# EAGLE board analyzer1704 (EAGLE 6.5.0)
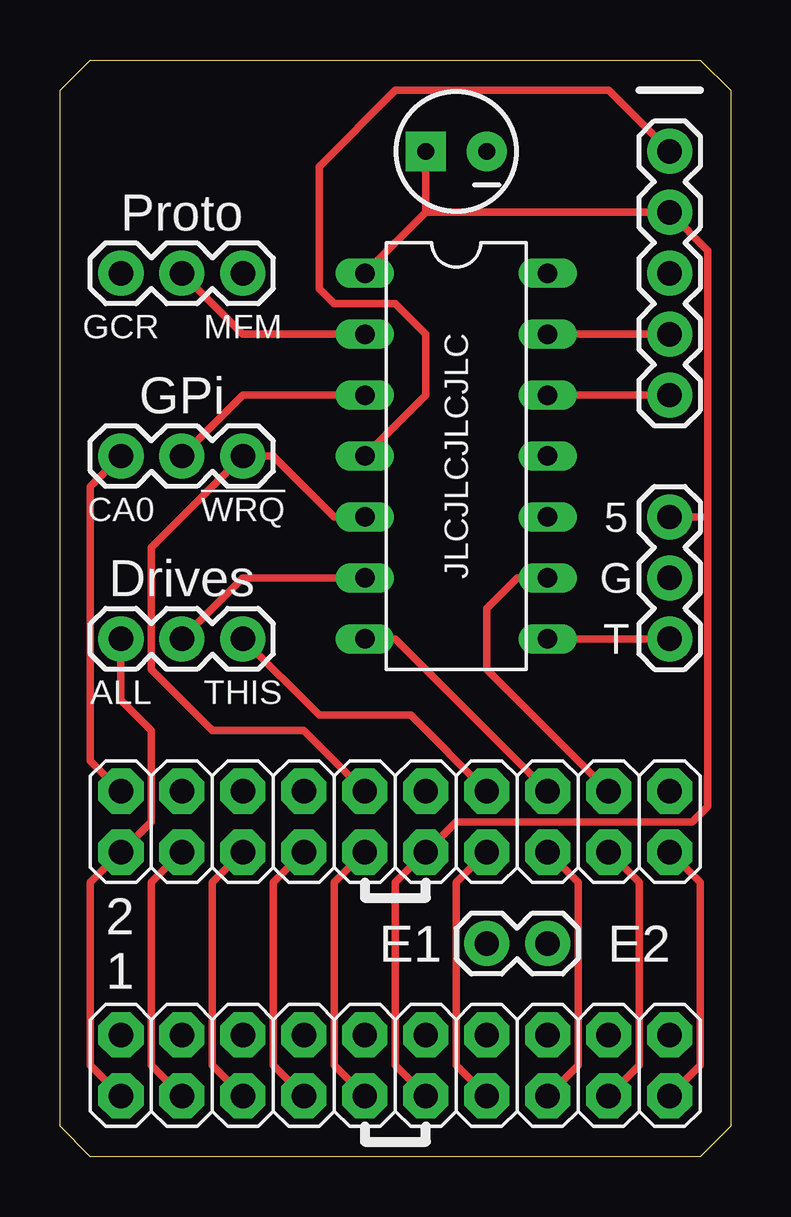
[diagram p0: board, top side]
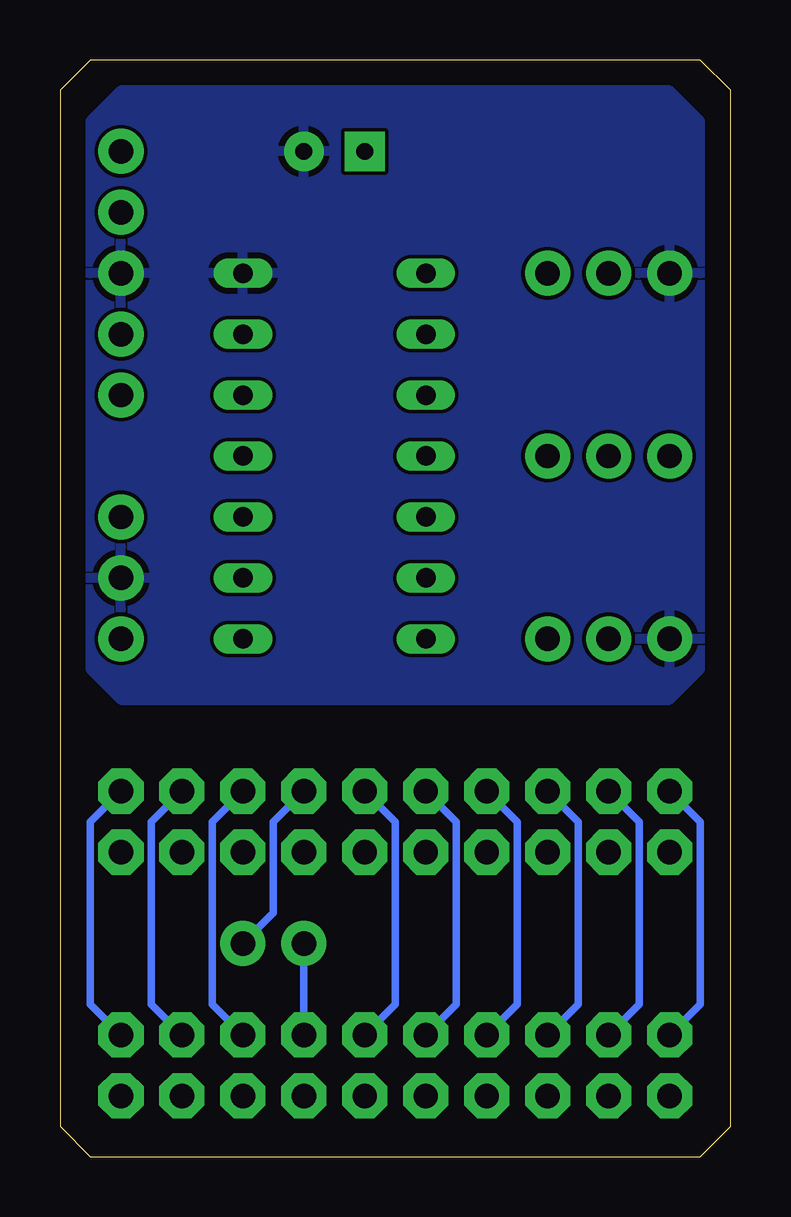
[diagram p1: board, bottom side, seen from below]

Size 27.94 x 45.72 mm. Coordinates in mm from the lower left corner, seen from the top.
Outline: 1.27,0 0,1.27 0,44.45 1.27,45.72 26.67,45.72 27.94,44.45 27.94,1.27 26.67,0 1.27,0
Copper layers (1*16): Top 0.0356mm / dielectric 1.5011mm / Bottom 0.0356mm
Design rules "LaenPCBOrder": minimum track width 6mil, minimum drill 13mil, track to track 6mil, track to pad 6mil, pad to pad 6mil, via to via 6mil, smd to smd 6mil, copper to edge 15mil, drill to drill 6mil, minimum pad ring 7mil, minimum via ring 7mil, stop-mask expansion 3mil, vias tented up to drill 0mil, thermal gap 10mil

## Footprints (pad centres in the part's own frame; a part is rotated, then mirrored left to right if it is on the bottom)
DIL14 = drill 0.813 long: 1 -7.62,-3.81; 2 -5.08,-3.81; 3 -2.54,-3.81; 4 0,-3.81; 5 2.54,-3.81; 6 5.08,-3.81; 7 7.62,-3.81; 8 7.62,3.81; 9 5.08,3.81; 10 2.54,3.81; 11 0,3.81; 12 -2.54,3.81; 13 -5.08,3.81; 14 -7.62,3.81
2X10 = drill 1.016 pad 1.88 octagon: 1 -11.43,-1.27; 2 -11.43,1.27; 3 -8.89,-1.27; 4 -8.89,1.27; 5 -6.35,-1.27; 6 -6.35,1.27; 7 -3.81,-1.27; 8 -3.81,1.27; 9 -1.27,-1.27; 10 -1.27,1.27; 11 1.27,-1.27; 12 1.27,1.27; 13 3.81,-1.27; 14 3.81,1.27; 15 6.35,-1.27; 16 6.35,1.27; 17 8.89,-1.27; 18 8.89,1.27; 19 11.43,-1.27; 20 11.43,1.27
1X03 = drill 1.016 pad 1.88: 1 0,0; 2 2.54,0; 3 5.08,0
1X02 = drill 1.016 pad 1.88: 1 0,0; 2 2.54,0
CPOL-RADIAL-10UF-25V = drill 0.7 pad 1.651 square: 1 1.27,0 | drill 0.7 pad 1.651: 2 -1.27,0
1X05 = drill 1.016 pad 1.88: 1 0,0; 2 2.54,0; 3 5.08,0; 4 7.62,0; 5 10.16,0

## Placement (x,y rotation side)
E$1  [DIL14]  16.51,29.21 270 top
E$2  [2X10]  13.97,3.81 0 top
E$3  [2X10]  13.97,13.97 0 top
E$4  [1X03]  7.62,29.21 180 top
E$5  [1X03]  7.62,21.59 180 top
E$6  [1X03]  7.62,36.83 180 top
E$7  [1X03]  25.4,21.59 90 top
E$8  [1X02]  17.78,8.89 0 top
E$9  [CPOL-RADIAL-10UF-25V]  16.51,41.91 180 top
E$10  [1X05]  25.4,31.75 90 top

## Library data of the parts
E$1 = microchip
E$2-E$8 E$10 = SparkFun-Connectors
E$9 = SparkFun-Capacitors

## Nets
GND: E$1.14 E$2.1 E$3.1 E$5.3 E$6.3 E$7.2 E$9.2 E$10.3
S$1: E$1.1 E$2.11 E$3.11 E$7.3 E$9.1
S$2: E$2.3 E$3.3
S$3: E$2.5 E$3.5
S$4: E$2.7 E$3.7
S$5: E$2.9 E$3.9
S$6: E$1.2 E$6.2
S$7: E$2.13 E$3.13
S$8: E$2.15 E$3.15
S$9: E$2.17 E$3.17
S$10: E$2.19 E$3.19
S$11: E$2.2 E$3.2 E$4.3
S$12: E$2.4 E$3.4
S$13: E$2.6 E$3.6
S$14: E$2.8 E$3.8
S$15: E$1.5 E$2.10 E$3.10 E$4.1
S$16: E$2.12 E$3.12
S$17: E$2.14 E$8.1
S$18: E$3.14 E$5.1 E$8.2
S$19: E$1.7 E$2.16 E$3.16
S$20: E$1.9 E$2.18 E$3.18
S$21: E$2.20 E$3.20
S$22: E$1.13 E$10.2
S$23: E$1.12 E$10.1
S$24: E$1.4 E$10.5
S$25: E$1.8 E$7.1
S$26: E$1.3 E$4.2
S$27: E$1.6 E$5.2

## Tracks (layer width: path | path; a pad name or v marks a point on that pad's centre or on a via)
GND
  Top 0.305: E$2.1 1.27,3.81 1.27,11.43 E$3.1 3.81,13.97 3.81,17.78 2.54,19.05 E$5.3
  pour Bottom: 1.27,43.18 2.54,44.45 25.4,44.45 26.67,43.18 26.67,20.32 25.4,19.05 2.54,19.05 1.27,20.32
S$1
  Top 0.305: E$2.11 13.97,3.81 13.97,11.43 E$3.11 16.51,13.97 26.35,13.97 26.99,14.61 26.99,26.67 | 26.99,26.67 26.99,37.78 25.4,39.37 15.24,39.37 | 15.24,39.37 E$1.1 | E$9.1 15.24,39.37 | E$7.3 26.99,26.67
S$2
  Top 0.305: E$2.3 3.81,3.81 3.81,11.43 E$3.3
S$3
  Top 0.305: E$2.5 6.35,3.81 6.35,11.43 E$3.5
S$4
  Top 0.305: E$2.7 8.89,3.81 8.89,11.43 E$3.7
S$5
  Top 0.305: E$2.9 11.43,3.81 11.43,11.43 E$3.9
S$6
  Top 0.305: E$6.2 7.62,34.29 E$1.2
S$7
  Top 0.305: E$2.13 16.51,3.81 16.51,11.43 E$3.13
S$8
  Top 0.305: E$2.15 21.59,3.81 21.59,11.43 E$3.15
S$9
  Top 0.305: E$2.17 24.13,3.81 24.13,11.43 E$3.17
S$10
  Top 0.305: E$2.19 26.67,3.81 26.67,11.43 E$3.19
S$11
  Top 0.305: E$3.2 1.27,16.51 1.27,27.94 E$4.3
  Bottom 0.305: E$2.2 1.27,6.35 1.27,13.97 E$3.2
S$12
  Bottom 0.305: E$2.4 3.81,6.35 3.81,13.97 E$3.4
S$13
  Bottom 0.305: E$2.6 6.35,6.35 6.35,13.97 E$3.6
S$14
  Bottom 0.305: E$2.8 8.89,6.35 8.89,13.97 E$3.8
S$15
  Top 0.305: E$3.10 10.16,17.78 6.35,17.78 3.81,20.32 3.81,25.4 E$4.1 8.89,29.21 11.43,26.67 E$1.5
  Bottom 0.305: E$2.10 11.43,6.35 11.43,13.97 E$3.10
S$16
  Bottom 0.305: E$2.12 13.97,6.35 13.97,13.97 E$3.12
S$17
  Bottom 0.305: E$2.14 E$8.1
S$18
  Top 0.305: E$3.14 14.61,18.41 10.79,18.41 E$5.1
  Bottom 0.305: E$8.2 19.05,10.16 19.05,13.97 E$3.14
S$19
  Top 0.305: E$1.7 13.97,21.59 E$3.16
  Bottom 0.305: E$2.16 21.59,6.35 21.59,13.97 E$3.16
S$20
  Top 0.305: E$3.18 17.78,20.32 17.78,22.86 19.05,24.13 E$1.9
  Bottom 0.305: E$2.18 24.13,6.35 24.13,13.97 E$3.18
S$21
  Bottom 0.305: E$2.20 26.67,6.35 26.67,13.97 E$3.20
S$22
  Top 0.305: E$10.2 E$1.13
S$23
  Top 0.305: E$10.1 E$1.12
S$24
  Top 0.305: E$10.5 22.86,44.45 13.97,44.45 10.79,41.27 10.79,36.2 11.43,35.56 13.97,35.56 15.24,34.29 15.24,31.75 E$1.4
S$25
  Top 0.305: E$7.1 E$1.8
S$26
  Top 0.305: E$4.2 7.62,31.75 E$1.3
S$27
  Top 0.305: E$5.2 7.62,24.13 E$1.6

## Text on the board
tNames: Proto | GCR | MFM | GPi | JLCJLCJLCJLC | CA0 | !WRQ | 5 | Drives | G | T | ALL | THIS | E1 | E2 | 2 / 1